# Altium PCB MBUS_Slave.PcbDoc
Units mm, origin at the board's own origin, x right, y up, seen from the top; angles counter-clockwise.
Board outline 98 x 45 mm, 2 copper layers (Top Layer, Bottom Layer); 64 components, 45 nets, 181 pads, 23 vias.
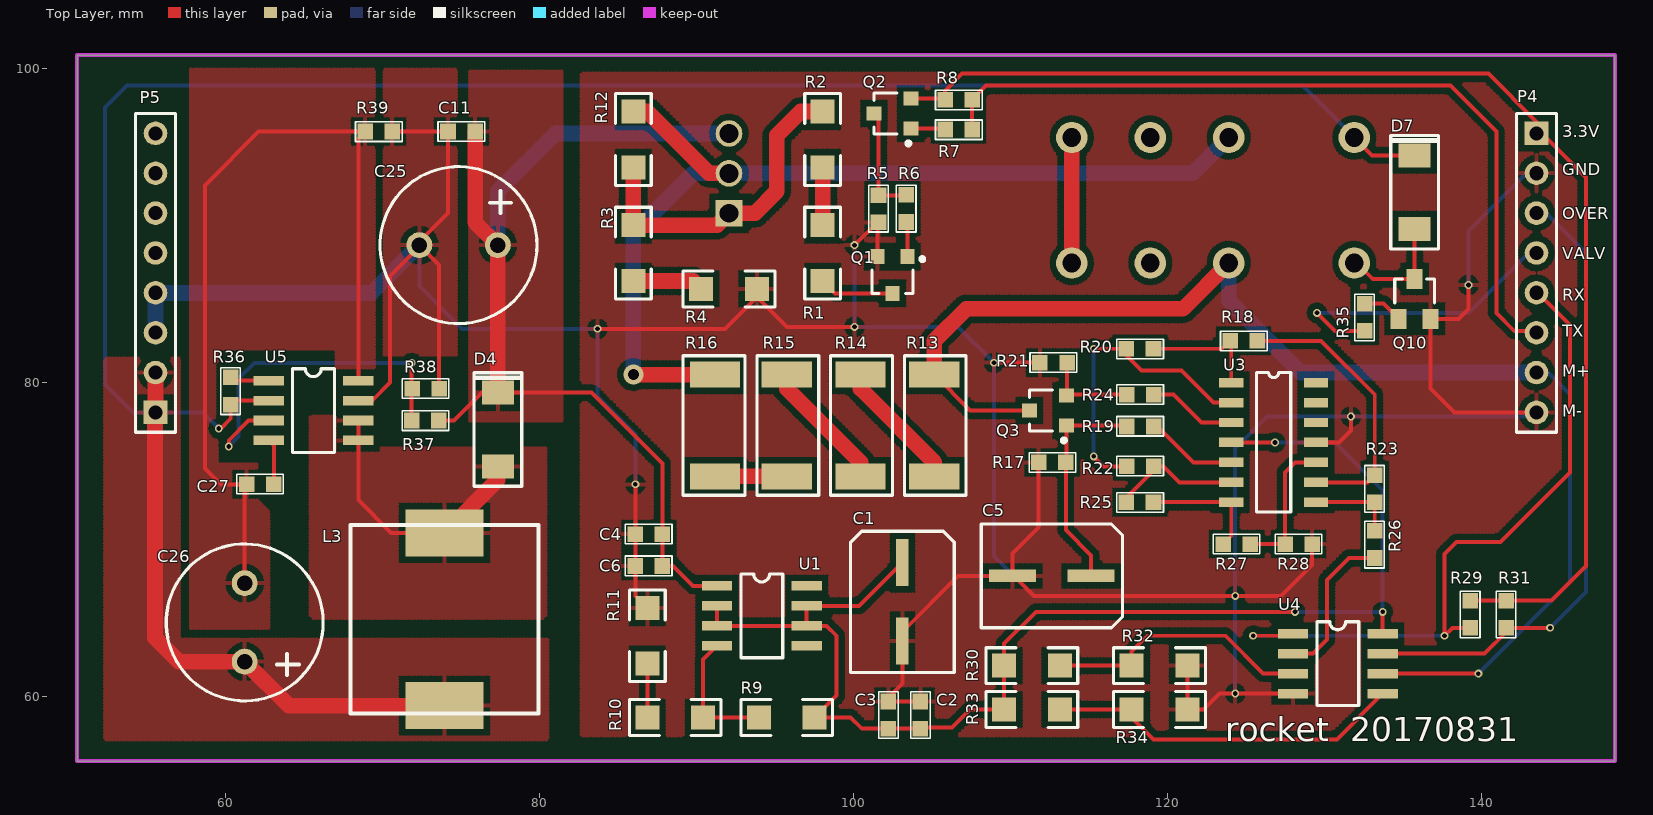
[diagram p0: Top Layer view]
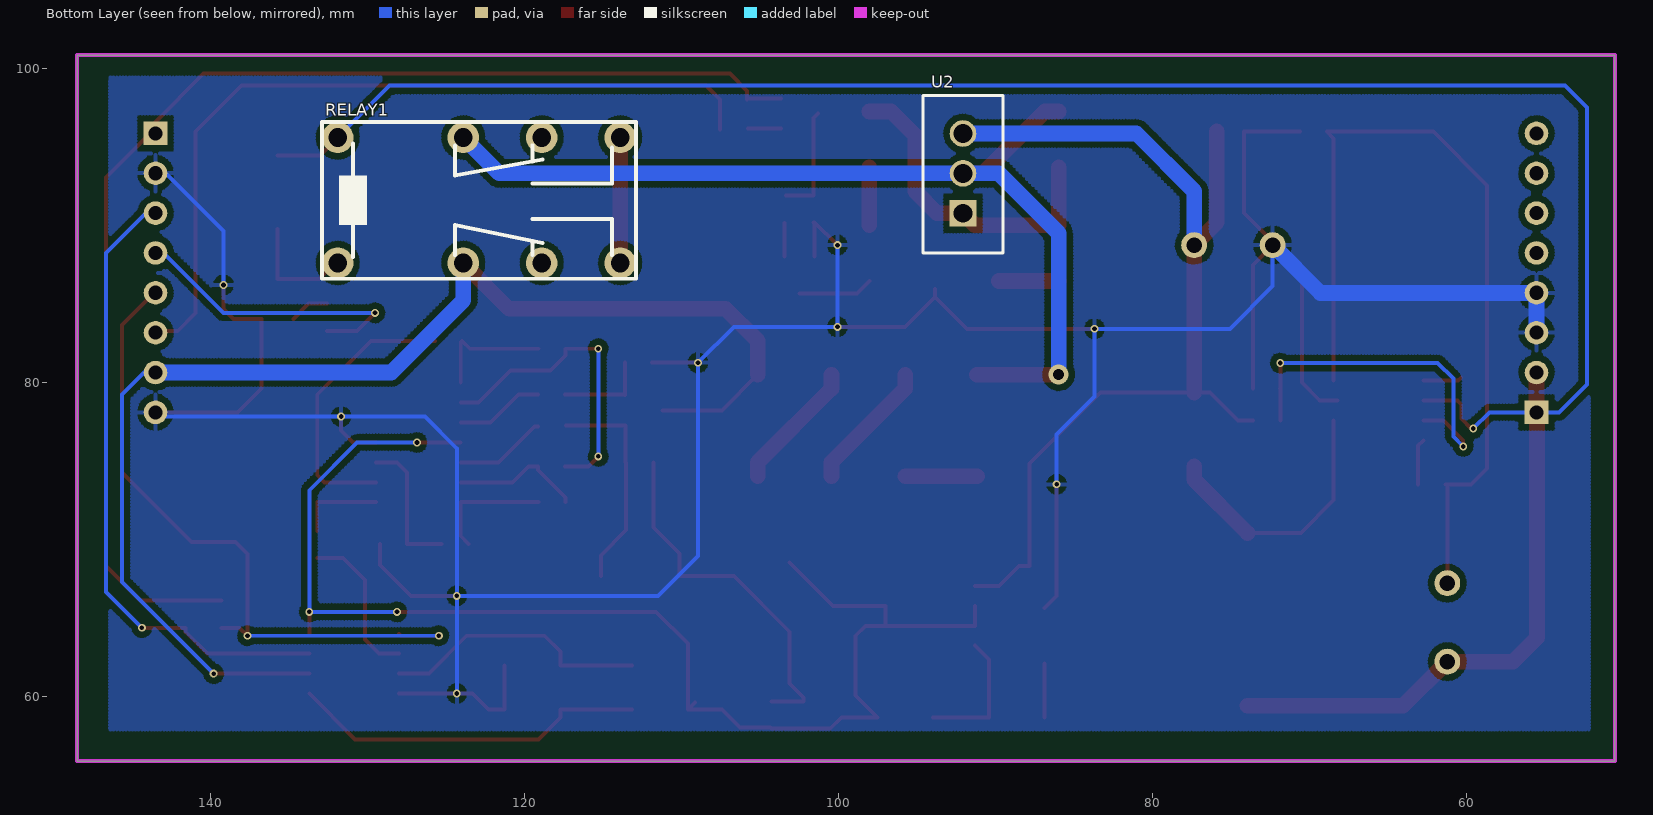
[diagram p1: Bottom Layer view, seen from below]

## Layer stack, top to bottom
Top Layer: signal copper 0.0356
Dielectric: dielectric 0.32, FR-4, Dk 4.8
Bottom Layer: signal copper 0.0356

## Board outline
50.53,55.885 50.53,100.885 148.53,100.885 148.53,55.885

## Design rules (kind name [scope] priority, off if disabled: settings)
Clearance [All] p1: gap=0.4
ComponentClearance [All] p1: gap=0.254 collisioncheckmode=3 verticalgap=0.254
PolygonConnect [All] p1: connectstyle=Relief reliefconductorwidth=0.254 reliefentries=4 polygonreliefangle="90 Angle"
RoutingVias [All] p1: holewidth=0.3 width=0.5 viastyle="Through Hole" minholewidth=0.3 minwidth=0.5 maxholewidth=0.711 maxwidth=1.27
SolderMaskExpansion [All] p1: expansion=0.102
TestPointUsage [All] p1: valid=0 allowmultiple=FALSE
Testpoint [All] p1: side=15 testpointundercomponent=TRUE minsize=1.016 maxsize=2.54 preferedsize=1.524 minholesize=0 maxholesize=1.016 preferedholesize=0.813 testpointgrid=0.025 style=1023 order=0123456789
Width [All] p1: maxlimit=1 minlimit=0.2 preferedwidth=0.254
18 further rules are at their usual default settings.

## Components (designator, comment, footprint, x,y, rotation, side; value= is the part's Value field where it differs from the comment)
C1 "Cap Pol3" C_6.3_5.3 103.124,66.04 r270 top
C2 "Cap" 0603 104.267,59.69 r90 top
C3 "Cap" 0603 102.235,59.69 r90 top
C4 "Cap" 0603 86.106,70.358 r180 top
C5 "Cap Pol3" C_6.3_5.3 112.649,67.691 r180 top
C6 "Cap" 0603 86.106,68.326 r180 top
C11 "Cap" 0603 74.168,96.012 r180 top
C25 "Cap Pol1" "C_DJ - duplicate" 77.343,88.773 r0 top
C26 "Cap Pol1" "C_DJ - duplicate" 61.214,62.23 r270 top
C27 "Cap" 0603 61.341,73.533 r180 top
D4 "SS34" M7-4007 77.343,74.676 r90 top
D7 "M7" M7-4007 135.763,89.789 r90 top
L3 "Inductor" L12*12 67.945,58.928 r0 top
P4 "Header 8" HDR1X8 143.53,95.894 r270 top
P5 "Header 8" HDR1X8 55.53,78.114 r90 top
Q1 "NPN" SOT-23 102.489,86.868 r180 top
Q2 "PNP" SOT-23 102.489,97.155 r90 top
Q3 "BAW56" SOT-23 112.395,78.232 r90 top
Q10 "2N3904" NPN-PNP 134.747,84.074 r0 top
R1 "Res1" 1206 98.044,88.265 r270 top
R2 "Res1" 1206 98.044,95.504 r270 top
R3 "Res1" 1206 85.979,88.265 r90 top
R4 "Res1" 1206 92.075,85.979 r180 top
R5 "Res1" 0603 101.6,91.948 r90 top
R6 "Res1" 0603 103.378,90.246 r270 top
R7 "Res1" 0603 107.569,96.139 r0 top
R8 "Res1" 0603 107.569,98.044 r0 top
R9 "Res1" 1206 95.758,58.674 r180 top
R10 "Res1" 1206 88.646,58.674 r180 top
R11 "Res1" 1206 86.868,63.881 r90 top
R12 "Res1" 1206 85.979,95.504 r270 top
R13 "Res1" 2512 105.156,80.518 r270 top
R14 "Res1" 2512 100.457,80.518 r270 top
R15 "Res1" 2512 95.758,80.518 r270 top
R16 "Res1" 2512 91.186,74.038 r90 top
R17 "Res1" 0603 113.538,74.93 r0 top
R18 "Res1" 0603 125.73,82.677 r0 top
R19 "Res1" 0603 117.424,77.216 r180 top
R20 "Res1" 0603 119.126,82.169 r0 top
R21 "Res1" 0603 111.887,81.28 r180 top
R22 "Res1" 0603 117.424,74.676 r180 top
R23 "Res1" 0603 133.223,72.39 r270 top
R24 "Res1" 0603 117.424,79.248 r180 top
R25 "Res1" 0603 119.126,72.39 r0 top
R26 "Res1" 0603 133.223,68.834 r270 top
R27 "Res1" 0603 123.571,69.723 r180 top
R28 "Res1" 0603 127.508,69.723 r180 top
R29 "Res1" 0603 139.319,64.389 r270 top
R30 "Res1" 1206 111.379,61.976 r0 top
R31 "Res1" 0603 141.605,64.389 r270 top
R32 "104(Good)" 1206 119.507,61.976 r0 top
R33 "Res1" 1206 111.379,59.182 r0 top
R34 "Res1" 1206 119.507,59.182 r0 top
R35 "Res2" 0603 132.588,83.312 r270 top
R36 "Res2" 0603 60.325,78.613 r270 top
R37 "Res2" 0603 73.584,77.597 r0 top
R38 "Res2" 0603 71.882,79.629 r180 top
R39 "Res2" 0603 70.612,96.012 r0 top
RELAY1 "Relay-DPDT" Relay-DPDP 113.919,95.63 r270 bottom
U1 "LM317_8" SOP8 91.313,67.056 r270 top
U2 "LM317_3" LM317_3 92.075,90.805 r90 bottom
U3 "LM224A" SOP14 124.079,80.01 r0 top
U4 "LM393" SOP8 128.016,64.008 r270 top
U5 "AX5203" SOP8 62.738,80.137 r270 top

## Footprints (in the part's own frame and the unit in brackets; to place one, negate y for a bottom-side part, rotate by r counter-clockwise, add the part's x,y. Pads: shape width x height; smd on the part's side, far side on the other; paste and mask are expansions set on the pad)
0603 [mil]
  rect 39x39 smd: 1(0,0) 2(-68,0)
  silkscreen extent -92,-25 25,24
1206 [mil]
  rect 60x60 smd: 1(-70,0) 2(70,0)
  silkscreen extent -115,-45 115,45, body extent -75,-35 75,35, height 39
2512 [mm]
  rect 1.65x3.2 smd: 1(0,0) 2(6.48,0)
  silkscreen extent -1.21,-1.91 7.68,2.03
C_6.3_5.3 [mm]
  rect 3x0.8 smd: 1(-2.5,0) 2(2.5,0)
  silkscreen extent -4.5,-3.3 4.5,3.3
"C_DJ - duplicate" [mil]
  round 65 hole 39: 1(0,0) 2(-196.85,0)
  silkscreen extent -295,-197 98,197
HDR1X8 [mm] "Connector; Header; 8 Position"
  rect 1.5x1.5 hole 0.9: 1(0,0)
  round 1.5 hole 0.9: 2(2.54,0) 3(5.08,0) 4(7.62,0) 5(10.16,0) 6(12.7,0) 7(15.24,0) 8(17.78,0)
  silkscreen extent -1.27,-1.27 19.05,1.27
L12*12 [mm]
  rect 5x3 smd: 1(6,11.5) 2(6,0.5)
  silkscreen extent 0,0 12,12
LM317_3 [mm]
  rect 1.7x1.7 hole 1.2: 1(0,0)
  round 1.7 hole 1.2: 2(2.54,0) 3(5.08,0)
  silkscreen extent -2.54,-2.54 7.49,2.54
M7-4007 [mil]
  rect 60x80 smd: 1(0,0) 2(185,0)
  silkscreen extent -50,-60 235,60
NPN-PNP [mil]
  rect 40x50 smd: B(0,0) C(40,100) E(80,0)
  silkscreen extent -10,40 90,100
Relay-DPDP [mm]
  round 2 hole 1.2: 1(0,-10) 2(0,-5) 3(0,0) 4(8,-10) 5(8,-5) 6(8,0) 7(0,-18) 8(8,-18)
  silkscreen extent -1,-19 9,1
SOP8 [mil]
  rect 24x76 smd: 1(0,0) 2(50,0) 3(100,0) 4(150,0) 5(150,225) 6(100,225) 7(50,225) 8(0,225)
  silkscreen extent -30,60 180,165
SOP14 [mm]
  rect 1.55x0.6 smd: 1(0,0) 2(0,-1.27) 3(0,-2.54) 4(0,-3.81) 5(0,-5.08) 6(0,-6.35) 7(0,-7.62) 8(5.4,-7.62) 9(5.4,-6.35) 10(5.4,-5.08) 11(5.4,-3.81) 12(5.4,-2.54) 13(5.4,-1.27) 14(5.4,0)
  silkscreen extent 1.61,-8.25 3.79,0.64
SOT-23 [mm]
  rect 0.9x0.95 smd: 1(0,1.175) 2(-0.95,-1.175) 3(0.95,-1.175)
  silkscreen extent -2.03,-1.14 1.3,1.18

## Part data
C1 C5: "Polarized Capacitor (Surface Mount)"
C2 C3 C4 C6 C11 C27: "Capacitor"
C25 C26: "Polarized Capacitor (Radial)"
D4 D7: library part "Diode 1N4007", "1 Amp General Purpose Rectifier"
P4: "Header, 8-Pin"
P5: library part "Header 4", "Header, 4-Pin"
Q1 Q10: "NPN General Purpose Amplifier"
Q2: "PNP Bipolar Transistor"
R1 R2 R3 R4 R5 R6 R7 R8 R9 R10 R11 R12 R13 R14 R15 R16 R17 R18 R19 R20 R21 R22 R23 R24 R25 R26 R27 R28 R29 R30 R31 R33 R34 R35 R36 R37 R38 R39: "Resistor"
R32: library part Res1, "Resistor"
RELAY1: "Dual-Pole Dual-Throw Relay"

## Via types
v1: diameter 0.5, hole 0.3, Top Layer to Bottom Layer, 22 vias
v2: diameter 1.27, hole 0.711, Top Layer to Bottom Layer, 1 vias

## Nets (pads, with @x,y where several pads share a name; then routed paths per layer and width w, separated by ;. In a path a pad name is that pad's centre, name@x,y a point inside that pad or via, vN(x,y) a via of type N, cw(c..) or ccw(c..) an arc to the next point about the centre after c; other vN are vias at no path point)
M+: P4.7 Q3.1 R13.1 RELAY1.4 U4.6 | length 82.9
  Top Layer w0.254: R13.1 107.442,78.232 Q3.1 ; U4.6 v1(139.827,61.468)
  Top Layer w1: R13.1 105.156,82.677 107.188,84.709 120.998,84.709 RELAY1.4
  Bottom Layer w0.254: v1(139.827,61.468) 145.669,67.31 145.669,79.248 144.263,80.654 P4.7@143.265,80.654
  Bottom Layer w1: RELAY1.4 123.919,85.25 128.515,80.654 P4.7@143.265,80.654
M-: C1.2 C2.1 C3.1 C4.1 C5.2 C6.1 C11.1 C25.2 P4.2 P4.8 P5.3 P5.4 Q1.3 Q10.E R4.1 R5.2 R11.2 R17.2 R21.1 R28.2 R32.2 R34.2 R38.2 R39.1 U3.11 U4.4 U5.7 | length 277.3
  Top Layer w0.254: U5.7@68.199,78.867 69.342,78.867 70.485,80.01 70.485,86.806 C25.2@72.397,88.719 ; R39.1 C11.1 74.168,90.805 C25.2@72.136,88.773 ; C25.2 73.609,87.507 R38.2 ; v1(83.693,83.439) 91.821,83.439 R4.1@93.853,85.471 ; v1(86.106,73.533) 86.106,66.421 R11.2 ; R4.1 R4.1@93.853,85.471 ; v1(100.076,83.566) 95.758,83.566 R4.1@93.853,85.471 ; v1(100.076,88.773) 101.524,90.221 R5.2 ; Q1.3 R5.2@101.539,90.16 ; C2.1 C3.1 102.235,59.944 103.124,60.833 103.124,64.135 106.68,67.691 110.236,67.691 111.506,66.421 127.254,66.421 129.235,68.402 R28.2 ; v1(108.966,81.28) R21.1 ; C5.2 110.149,69.128 111.811,70.79 R17.2 ; R32.2 R34.2 122.301,59.182 123.317,60.198 U4.4 ; U3.11 130.937,76.2 131.699,76.962 v1(131.699,77.851) ; v1(139.192,86.233) 139.192,84.709 138.557,84.074 Q10.E 136.779,79.629 138.294,78.114 P4.8
  Bottom Layer w0.254: C25.2 72.343,86.153 75.057,83.439 v1(83.693,83.439) 83.693,79.121 86.106,76.708 v1(86.106,73.533) ; v1(100.076,88.773) v1(100.076,83.566) 106.68,83.566 v1(108.966,81.28) 108.966,68.961 111.506,66.421 v1(124.333,66.421) ; v1(124.333,60.198) 124.333,75.819 126.365,77.851 143.267,77.851 P4.8 ; v1(139.192,86.233) 139.192,89.662 142.884,93.354 P4.2
  Bottom Layer w1: P5.3 P5.4 55.539,85.725 69.295,85.725 C25.2
NetC5_1: C5.1 Q3.2 R17.1 R19.1 | length 14
  Top Layer w0.254: R17.1 113.538,70.612 115.149,69.001 C5.1 ; R17.1@113.57,74.962 Q3.2 R19.1@117.358,77.282
NetC27_2: C27.2 U5.4 | length 2.9
  Top Layer w0.254: U5.4 63.068,75.997 C27.2
NetD4_1: D4.1 L3.1 U5.5 U5.6 | length 17.1
  Top Layer w0.254: U5.6 68.453,72.517 70.542,70.428 L3.1
  Top Layer w1: L3.1 77.343,73.826 D4.1
NetD7_1: D7.1 Q10.C RELAY1.8 | length 7.4
  Top Layer w0.254: RELAY1.8 132.08,87.63 133.096,86.614 Q10.C D7.1
NetQ1_1: Q1.1 R1.2 | length 4.8
  Top Layer w0.254: R1.2 98.838,85.693 Q1.1
NetQ1_2: Q1.2 R6.1 | length 2.1
  Top Layer w0.254: Q1.2 R6.1@103.439,90.185
NetQ2_1: Q2.1 R5.1 R6.2 | length 7.1
  Top Layer w0.254: Q2.1 101.6,96.869 R5.1 R6.2@103.353,91.948
NetQ2_2: Q2.2 R7.2 | length 2.1
  Top Layer w0.254: Q2.2 R7.2@105.776,96.205
NetQ3_3: Q3.3 R21.2 R24.1 | length 5.9
  Top Layer w0.254: R21.2 113.614,79.226 113.636,79.248 R24.1
NetQ10_B: Q10.B R35.2 | length 2.6
  Top Layer w0.254: R35.2 133.782,85.039 Q10.B
NetR1_1: R1.1 R2.2 | length 3.7
  Top Layer w1: R1.1 R2.2
NetR2_1: R2.1 R3.2 R12.2 U2.1 | length 20.8
  Top Layer w1: R12.2 R3.2 91.313,90.043 U2.1 93.726,90.805 95.123,92.202 95.123,95.758 96.647,97.282 R2.1
NetR3_1: R3.1 R4.2 | length 3.8
  Top Layer w1: R3.1 R4.2@89.789,86.487
NetR9_2: R9.2 R10.1 U1.4 | length 8.5
  Top Layer w0.254: U1.4 90.424,62.357 R10.1 R9.2
NetR10_2: R10.2 R11.1 | length 3.4
  Top Layer w0.254: R10.2 R11.1
NetR12_1: R12.1 R16.2 RELAY1.1 U2.2 | length 62.4
  Top Layer w1: v2(85.979,80.518) R16.2 ; R12.1 86.868,97.282 90.805,93.345 U2.2
  Bottom Layer w1: v2(85.979,80.518) 85.979,89.535 89.789,93.345 121.634,93.345 RELAY1.1
NetR13_2: R13.2 R14.1 | length 8.4
  Top Layer w1: R14.1 100.457,79.629 105.156,74.93 R13.2
NetR14_2: R14.2 R15.1 | length 8.4
  Top Layer w1: R15.1 95.758,79.629 100.457,74.93 R14.2
NetR15_2: R15.2 R16.1 | length 4.6
  Top Layer w1: R16.1 R15.2
NetR18_1: R18.1 R23.2 U3.9 | length 18
  Top Layer w0.254: R18.1 129.794,82.677 133.223,79.248 R23.2 132.766,73.66 U3.9
NetR18_2: R18.2 R20.1 U3.1 | length 7.7
  Top Layer w0.254: R20.1 123.495,82.169 R18.2 ; U3.1 R18.2@124.079,82.601
NetR19_2: R19.2 U3.5 | length 5.9
  Top Layer w0.254: R19.2 119.38,77.216 121.666,74.93 U3.5
NetR20_2: R20.2 R22.1 U3.2 | length 19.7
  Top Layer w0.254: v1(115.316,75.311) 115.951,74.676 R22.1 ; v1(115.316,82.169) R20.2 117.399,81.737 118.364,80.772 120.904,80.772 122.936,78.74 U3.2
  Bottom Layer w0.254: v1(115.316,75.311) v1(115.316,82.169)
NetR22_2: R22.2 R25.2 U3.6 | length 8.4
  Top Layer w0.254: R25.2 117.399,72.695 119.151,74.447 R22.2 119.761,74.676 120.777,73.66 U3.6
NetR23_1: R23.1 R26.2 U3.8 | length 5.6
  Top Layer w0.254: U3.8 R23.1 R26.2
NetR24_2: R24.2 U3.3 | length 5.7
  Top Layer w0.254: R24.2 120.396,79.248 122.174,77.47 U3.3
NetR25_1: R25.1 R27.1 U3.7 | length 7.8
  Top Layer w0.254: R25.1 U3.7 124.079,70.231 R27.1
NetR26_1: R26.1 U4.2 | length 10
  Top Layer w0.254: U4.2 129.286,62.738 130.175,63.627 130.175,67.437 131.572,68.834 R26.1
NetR27_2: R27.2 R28.1 U3.10 | length 9
  Top Layer w0.254: R27.2 R28.1 127.508,74.295 128.143,74.93 U3.10
NetR30_2: R30.2 R32.1 U4.3 | length 17.2
  Top Layer w0.254: R30.2 R32.1 117.729,62.865 118.745,63.881 123.698,63.881 126.111,61.468 U4.3
NetR33_2: R33.2 R34.1 U4.5 | length 22.9
  Top Layer w0.254: R33.2 R34.1 117.729,58.674 119.126,57.277 130.81,57.277 U4.5
NetR36_2: R36.2 U5.1 | length 2.5
  Top Layer w0.254: R36.2 60.528,80.137 U5.1
NetR37_2: R37.2 R38.1 U5.3 | length 23.2
  Top Layer w0.254: v1(60.198,75.946) 60.198,76.327 61.468,77.597 U5.3 ; R37.2 v1(71.857,81.255) ; R38.1@71.857,79.604 R38.1
  Bottom Layer w0.254: v1(60.198,75.946) 60.833,76.581 60.833,80.264 61.824,81.255 v1(71.857,81.255)
NetRELAY1_3: RELAY1.3 RELAY1.6 | length 8
  Top Layer w1: RELAY1.6 RELAY1.3
OVER: P4.3 R31.1 U4.7 | length 40.8
  Top Layer w0.254: U4.7 140.208,62.738 141.605,64.135 R31.1 v1(144.399,64.389) ; P4.3 P4.3@143.755,90.814
  Bottom Layer w0.254: P4.3 144.136,90.814 146.685,88.265 146.685,66.675 v1(144.399,64.389)
RX: P4.5 R29.1 U4.1 | length 44.4
  Top Layer w0.254: v1(125.476,63.881) 127.889,63.881 U4.1 ; R29.1 138.176,64.389 v1(137.668,63.881) 137.668,69.088 138.43,69.85 141.224,69.85 145.669,74.295 145.669,83.693 143.628,85.734 P4.5
  Bottom Layer w0.254: v1(125.476,63.881) v1(137.668,63.881)
SGND: C26.2 C27.1 R39.2 U5.8 | length 55
  Top Layer w0.254: C26.2 C27.1@61.214,73.406 ; C27.1 59.69,73.533 58.674,74.549 58.674,92.583 62.103,96.012 R39.2 68.453,95.58 U5.8
TX: P4.6 R7.1 R8.1 | length 51.3
  Top Layer w0.254: R7.1 R8.1 108.458,98.933 138.049,98.933 140.97,96.012 140.97,84.455 142.113,83.312 P4.6@143.383,83.312
VALVE: P4.4 R35.1 | length 19.1
  Top Layer w0.254: v1(129.54,84.455) 130.683,83.312 R35.1
  Bottom Layer w0.254: v1(129.54,84.455) 139.192,84.455 143.011,88.274 P4.4
VCC_3.3V: P4.1 Q2.3 R8.2 R29.2 R31.2 | length 80.2
  Top Layer w0.254: Q2.3 R8.2@105.781,98.105 ; R8.2 105.842,98.603 106.934,99.695 140.462,99.695 143.53,96.627 P4.1 143.882,95.894 146.685,93.091 146.685,68.326 144.475,66.116 R29.2
VCC_12V: C26.1 D7.2 L3.2 P5.1 P5.2 R36.1 RELAY1.7 U5.2 | length 153.5
  Top Layer w0.254: v1(59.563,77.089) 59.69,77.089 60.325,77.724 R36.1 60.579,78.867 U5.2 ; RELAY1.7 133.061,94.488 D7.2
  Top Layer w1: P5.2 P5.1 55.499,78.083 55.499,63.754 57.023,62.23 C26.1 64.016,59.428 L3.2
  Bottom Layer w0.254: v1(59.563,77.089) 58.538,78.114 54.093,78.114 52.324,79.883 52.324,97.536 53.721,98.933 128.616,98.933 RELAY1.7
VCC_29V: C1.1 C2.2 C3.2 R9.1 R30.1 R33.1 U1.2 U1.3 U1.6 U1.7 U3.4 U4.8 | length 86.2
  Top Layer w0.254: U1.2 U1.3 98.298,64.516 98.933,63.881 98.933,60.071 R9.1 99.822,58.674 100.533,57.963 C2.2 104.343,58.039 106.299,58.039 107.442,59.182 R33.1 ; U1.6 U1.7 100.37,65.786 C1.1 ; R33.1@109.144,59.639 R33.1 ; U3.4 v1(126.873,76.2) ; v1(128.143,65.405) 111.633,65.405 109.601,63.373 R33.1 ; U4.8 v1(133.731,65.405)
  Bottom Layer w0.254: v1(126.873,76.2) 130.683,76.2 133.731,73.152 v1(133.731,65.405) v1(128.143,65.405)
VCC_38V: C4.2 C6.2 C11.2 C25.1 D4.2 R37.1 U1.1 U2.3 | length 64.3
  Top Layer w0.254: R37.1 74.549,77.597 76.327,79.375 83.312,79.375 87.833,74.854 C6.2 88.519,68.326 89.789,67.056 U1.1
  Top Layer w1: C11.2 75.895,90.221 C25.1 D4.2
  Bottom Layer w1: C25.1 77.343,92.202 81.026,95.885 U2.3
pads on no net: P5.5 P5.6 P5.7 P5.8 RELAY1.2 RELAY1.5 U1.5 U1.8 U3.12 U3.13 U3.14

## Polygon pours and split planes (outlines as drawn)
VCC_12V on Top Layer "Top Layer-No Net" (hatched 90Degree grid 0.2 track 0.254, remove dead copper, pour order 1000): 52.324,81.534 57.023,81.534 57.023,69.469 57.023,63.627 80.518,63.627 80.518,57.404 80.645,57.277 52.324,57.277
NetD4_1 on Top Layer "Top Layer-No Net" (hatched 90Degree grid 0.2 track 0.254, remove dead copper, pour order 1001): 80.391,75.819 80.391,65.024 65.405,65.024 65.405,77.851 69.723,77.851 69.723,75.819
SGND on Top Layer "Top Layer-No Net" (hatched 90Degree grid 0.2 track 0.254, remove dead copper, pour order 1002): 62.738,64.389 57.785,64.389 57.785,71.247 57.785,99.949 69.469,99.949 69.469,79.756 67.056,79.756 67.056,81.407 67.056,82.169 59.436,82.169 59.436,76.073 59.436,74.803 61.976,74.803 61.976,72.517 62.738,71.755
M- on Top Layer "Top Layer-No Net" (hatched 90Degree grid 0.2 track 0.254, remove dead copper, pour order 1003): 70.104,81.788 70.104,99.949 74.676,99.949 74.676,81.788
VCC_38V on Top Layer "Top Layer-No Net" (hatched 90Degree grid 0.2 track 0.254, remove dead copper, pour order 1004): 75.565,77.597 75.565,99.822 81.407,99.822 81.407,80.391 81.407,77.597
M- on Top Layer "Top Layer-No Net" (hatched 90Degree grid 0.2 track 0.254, remove dead copper, pour order 1005): 82.677,99.695 146.431,99.695 146.431,57.531 82.677,57.531
M- on Bottom Layer "Top Layer-No Net" (hatched 90Degree grid 0.2 track 0.254, remove dead copper, pour order 1006): 146.431,99.441 146.431,57.912 144.018,57.912 52.197,57.912 52.197,61.087 52.197,99.441

## Keep-outs
Keep-Out Layer:
  the board outline again, w0.254

## Silkscreen, mask and mechanical layers (free items; w line width, h text height)
Top Overlay:
  text "3.3V" at 145.161,95.631 h0.76
  text "GND" at 145.161,93.218 h0.76
  text "OVER" at 145.161,90.424 h0.76
  text "VALV" at 145.161,87.884 h0.76
  text "RX" at 145.161,85.217 h0.76
  text "TX" at 145.161,82.931 h0.76
  text "M+" at 145.161,80.391 h0.76
  text "M-" at 145.161,77.851 h0.76
  text "rocket  20170831" at 123.698,57.15 h1.52